# EAGLE board control panel (EAGLE 8.6.3)
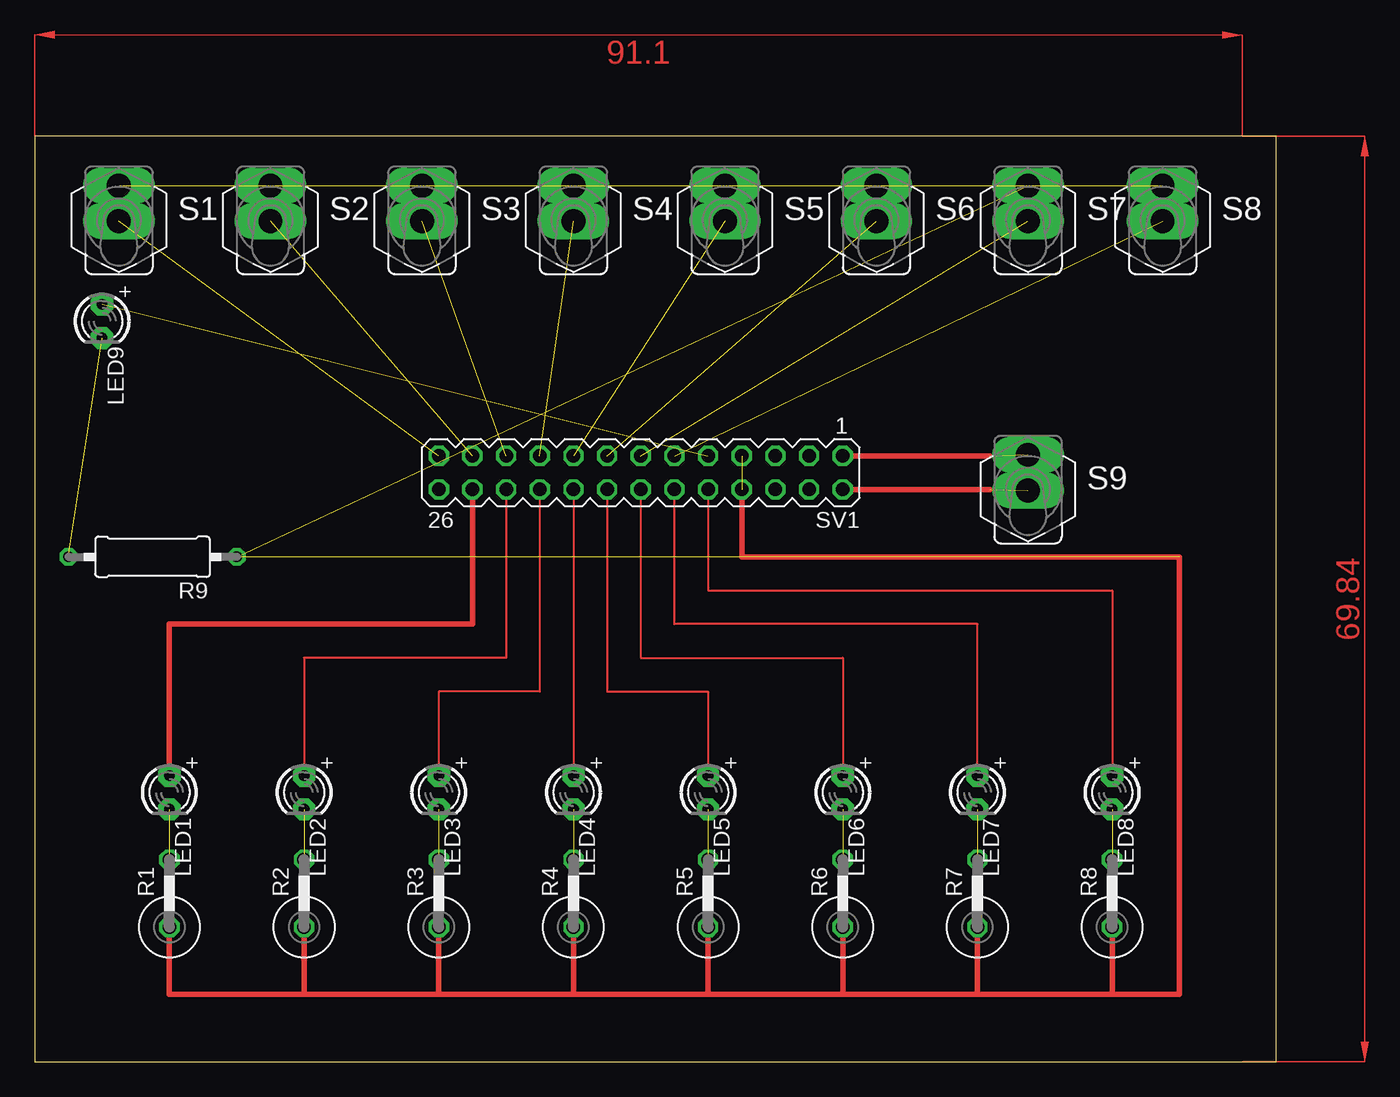
[diagram p0: board, top side]

Size 93.65 x 69.85 mm. Coordinates in mm from the lower left corner, seen from the top.
Outline: 0,0 93.65,0 93.65,69.84 0.01,69.85 0,0
Copper layers (1*16): Top 0.035mm / dielectric 1.5mm / Bottom 0.035mm
Design rules "default": minimum track width 6mil, minimum drill 0.35mm, track to track 6mil, track to pad 6mil, pad to pad 6mil, via to via 6mil, smd to smd 6mil, copper to edge 40mil, drill to drill 6mil, minimum pad ring 10mil, minimum via ring 8mil, stop-mask expansion 4mil, vias tented up to drill 0mil, thermal gap 10mil

## Footprints (pad centres in the part's own frame; a part is rotated, then mirrored left to right if it is on the bottom)
LED3MM = drill 0.813 pad 1.676 octagon: A -1.27,0; K 1.27,0
P0613V = drill 1.016 octagon: 1 -2.54,0; 2 2.54,0
0309/12 = drill 0.813 octagon: 1 -6.35,0; 2 6.35,0
MS243 = drill 1.803 pad 2 long: 1 0,-1.346; 2 0,1.346
MA13-2 = drill 1.016 octagon: 1 -15.24,-1.27; 2 -15.24,1.27; 3 -12.7,-1.27; 4 -12.7,1.27; 5 -10.16,-1.27; 6 -10.16,1.27; 7 -7.62,-1.27; 8 -7.62,1.27; 9 -5.08,-1.27; 10 -5.08,1.27; 11 -2.54,-1.27; 12 -2.54,1.27; 13 0,-1.27; 14 0,1.27; 15 2.54,-1.27; 16 2.54,1.27; 17 5.08,-1.27; 18 5.08,1.27; 19 7.62,-1.27; 20 7.62,1.27; 21 10.16,-1.27; 22 10.16,1.27; 23 12.7,-1.27; 24 12.7,1.27; 25 15.24,-1.27; 26 15.24,1.27

## Placement (x,y rotation side)
LED1  [LED3MM]  10.16,20.32 270 top
LED2  [LED3MM]  20.32,20.32 270 top
LED3  [LED3MM]  30.48,20.32 270 top
LED4  [LED3MM]  40.64,20.32 270 top
LED5  [LED3MM]  50.8,20.32 270 top
LED6  [LED3MM]  60.96,20.32 270 top
LED7  [LED3MM]  71.12,20.32 270 top
LED8  [LED3MM]  81.28,20.32 270 top
LED9  [LED3MM]  5.08,55.88 270 top
R1  [P0613V]  10.16,12.7 90 top
R2  [P0613V]  20.32,12.7 90 top
R3  [P0613V]  30.48,12.7 90 top
R4  [P0613V]  40.64,12.7 90 top
R5  [P0613V]  50.8,12.7 90 top
R6  [P0613V]  60.96,12.7 90 top
R7  [P0613V]  71.12,12.7 90 top
R8  [P0613V]  81.28,12.7 90 top
R9  [0309/12]  8.89,38.1 180 top
S1  [MS243]  6.35,64.77 0 top
S2  [MS243]  17.78,64.77 0 top
S3  [MS243]  29.21,64.77 0 top
S4  [MS243]  40.64,64.77 0 top
S5  [MS243]  52.07,64.77 0 top
S6  [MS243]  63.5,64.77 0 top
S7  [MS243]  74.93,64.77 0 top
S8  [MS243]  85.09,64.77 0 top
S9  [MS243]  74.93,44.45 0 top
SV1  [MA13-2]  45.72,44.45 180 top

## Library data of the parts
LED1-LED9 = adafruit
R1-R9 = rcl; SPICEPREFIX: R
S1-S9 = switch
SV1 = con-lstb; OC_FARNELL: unknown; OC_NEWARK: unknown

## Nets
GND: R1.1 R2.1 R3.1 R4.1 R5.1 R6.1 R7.1 R8.1 R9.1 S1.2 S2.2 S3.2 S4.2 S5.2 S6.2 S7.2 S8.2 SV1.7 SV1.8
N$1: LED1.A SV1.24
N$2: LED2.A SV1.22
N$3: LED3.A SV1.20
N$4: LED4.A SV1.18
N$5: LED5.A SV1.16
N$6: LED6.A SV1.14
N$7: LED7.A SV1.12
N$8: LED8.A SV1.10
N$9: LED1.K R1.2
N$10: LED2.K R2.2
N$11: LED3.K R3.2
N$12: LED4.K R4.2
N$13: LED5.K R5.2
N$14: LED6.K R6.2
N$15: LED7.K R7.2
N$16: LED8.K R8.2
N$17: S1.1 SV1.25
N$18: S2.1 SV1.23
N$19: S3.1 SV1.21
N$20: S4.1 SV1.19
N$21: S5.1 SV1.17
N$22: S6.1 SV1.15
N$23: S7.1 SV1.13
N$24: S8.1 SV1.11
N$25: S9.1 SV1.2
N$26: S9.2 SV1.1
N$27: LED9.A SV1.9
N$28: LED9.K R9.2

## Tracks (layer width: path | path; a pad name or v marks a point on that pad's centre or on a via)
GND  (10 unrouted)
  Top 0.406: SV1.8 53.34,38.1 86.36,38.1 86.36,5.08 81.28,5.08 | 81.28,5.08 71.12,5.08 | 71.12,5.08 60.96,5.08 | 60.96,5.08 50.8,5.08 | 50.8,5.08 40.64,5.08 | 40.64,5.08 30.48,5.08 | 30.48,5.08 20.32,5.08 | 20.32,5.08 10.16,5.08 R1.1 | R8.1 81.28,5.08 | R7.1 71.12,5.08 | R6.1 60.96,5.08 | R5.1 50.8,5.08 | R4.1 40.64,5.08 | R3.1 30.48,5.08 | R2.1 20.32,5.08
N$1
  Top 0.406: SV1.24 33.02,33.02 10.16,33.02 LED1.A
N$2
  Top 0.152: SV1.22 35.56,30.48 20.32,30.48 LED2.A
N$3
  Top 0.152: SV1.20 38.1,27.94 30.48,27.94 LED3.A
N$4
  Top 0.152: SV1.18 LED4.A
N$5
  Top 0.152: SV1.16 43.18,27.94 50.8,27.94 LED5.A
N$6
  Top 0.152: SV1.14 45.72,30.48 60.96,30.48 LED6.A
N$7
  Top 0.152: LED7.A 71.12,33.02 48.26,33.02 SV1.12
N$8
  Top 0.152: SV1.10 50.8,35.56 81.28,35.56 LED8.A
N$9  (1 unrouted)
N$10  (1 unrouted)
N$11  (1 unrouted)
N$12  (1 unrouted)
N$13  (1 unrouted)
N$14  (1 unrouted)
N$15  (1 unrouted)
N$16  (1 unrouted)
N$17  (1 unrouted)
N$18  (1 unrouted)
N$19  (1 unrouted)
N$20  (1 unrouted)
N$21  (1 unrouted)
N$22  (1 unrouted)
N$23  (1 unrouted)
N$24  (1 unrouted)
N$25  (1 unrouted)
  Top 0.406: SV1.2 72.06,43.18
N$26  (1 unrouted)
  Top 0.406: SV1.1 71.12,45.72 72.06,45.72
N$27  (1 unrouted)
N$28  (1 unrouted)
(copper drawn outside any net)
  shapes: Top area x2